# EAGLE board Board_4_Buttons (EAGLE 9.6.2)
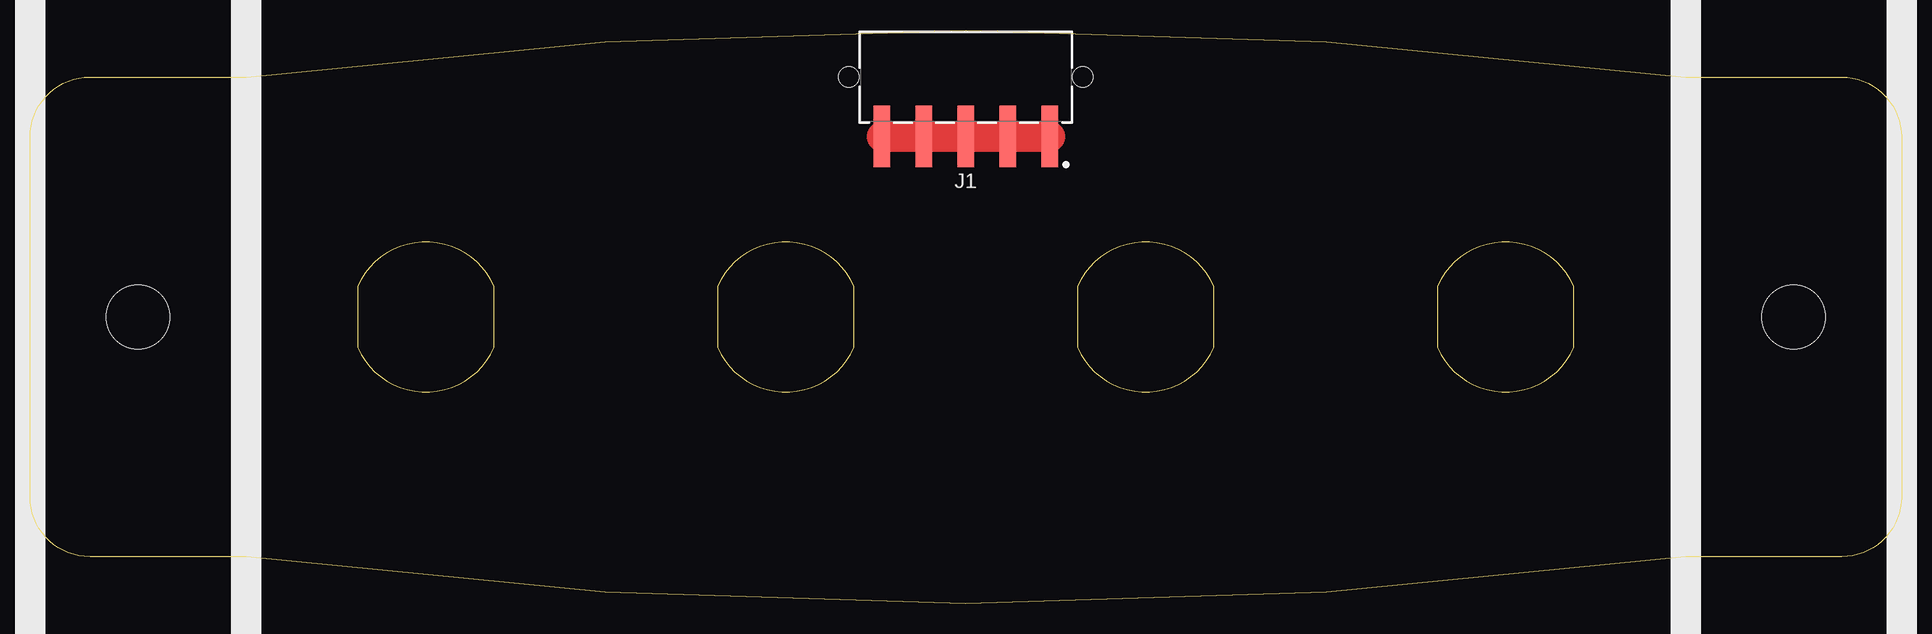
[diagram p0: board, top side]

Size 156 x 47.87 mm. Coordinates in mm from the lower left corner, seen from the top.
Outline: 18,3.93 5,3.93 arc-90 0,8.93 0,38.93 arc-90 5,43.93 18,43.93 arc-15 138,43.93 151,43.93 arc-90 156,38.93 156,8.93 arc-90 151,3.93 138,3.93 arc-15 18,3.93
Outline: 38.7,21.37 38.7,26.5 arc132 27.3,26.5 27.3,21.37 arc132 38.7,21.37
Outline: 68.7,21.37 68.7,26.5 arc132 57.3,26.5 57.3,21.37 arc132 68.7,21.37
Outline: 98.7,21.37 98.7,26.5 arc132 87.3,26.5 87.3,21.37 arc132 98.7,21.37
Outline: 128.7,21.37 128.7,26.5 arc132 117.3,26.5 117.3,21.37 arc132 128.7,21.37
Copper layers 1: Top 0.035mm
Design rules "default *": minimum track width 6mil, minimum drill 0.35mm, track to track 6mil, track to pad 6mil, pad to pad 6mil, via to via 6mil, smd to smd 6mil, copper to edge 40mil, drill to drill 6mil, minimum pad ring 10mil, minimum via ring 8mil, stop-mask expansion 4mil, vias tented up to drill 0mil, thermal gap 10mil
Holes 5.3 mm at 9,23.93 147,23.93

## Footprints (pad centres in the part's own frame; a part is rotated, then mirrored left to right if it is on the bottom)
691508110305 = smd 1.4 x 5.1: 1 -7,4.95; 2 -3.5,4.95; 3 0,4.95; 4 3.5,4.95; 5 7,4.95 | hole 1.7: -9.75,0; 9.75,0

## Placement (x,y rotation side)
J1  [691508110305]  78,43.93 180 top

## Library data of the parts
J1 = Wurth_Connectors_WR-TBL Rising Cage Clamp; DATASHEET-URL: https://www.we-online.com/catalog/datasheet/691508110305.pdf; IR-UL: 10A; MOUNT: THT; PART-NUMBER: 691508110305; PINS: 5; PITCH: 3.5mm; TYPE: Horizontal; WIRE: 30 to 16 (AWG) 0.05 to 1.31 (mm²); WORKING-VOLTAGE-UL: 300V (AC)

## Nets
N$1: J1.1 J1.2 J1.3 J1.4 J1.5

## Tracks (layer width: path | path; a pad name or v marks a point on that pad's centre or on a via)
N$1
  Top 2.54: J1.5 J1.4 78,38.93 | J1.1 J1.2 78,38.93 | J1.3 78,38.93